# Altium PCB CloudCover.PcbDoc
Units mm, origin at the board's own origin, x right, y up, seen from the top; angles counter-clockwise.
Board outline 27.94 x 33.02 mm, 4 copper layers (Top Layer, Int1 (GND), Int2 (PWR), Bottom Layer), stack 0.76 mm thick; 67 components, 52 nets, 260 pads, 132 vias.
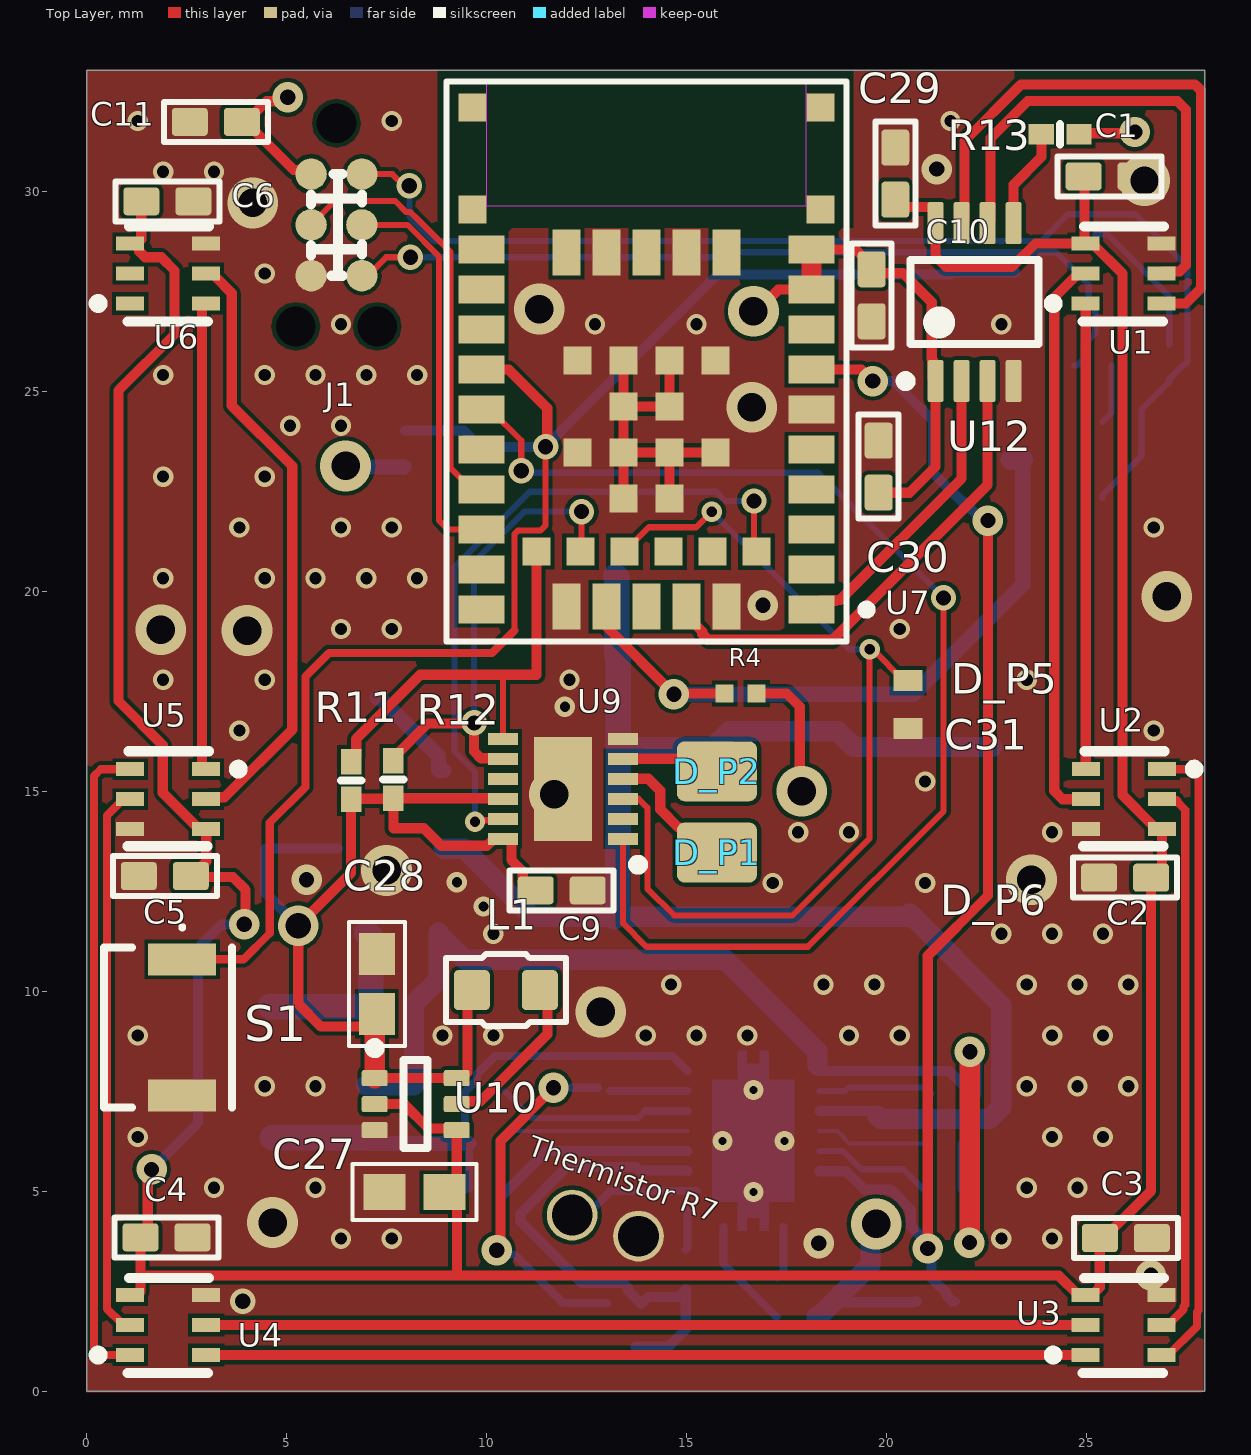
[diagram p0: Top Layer view]
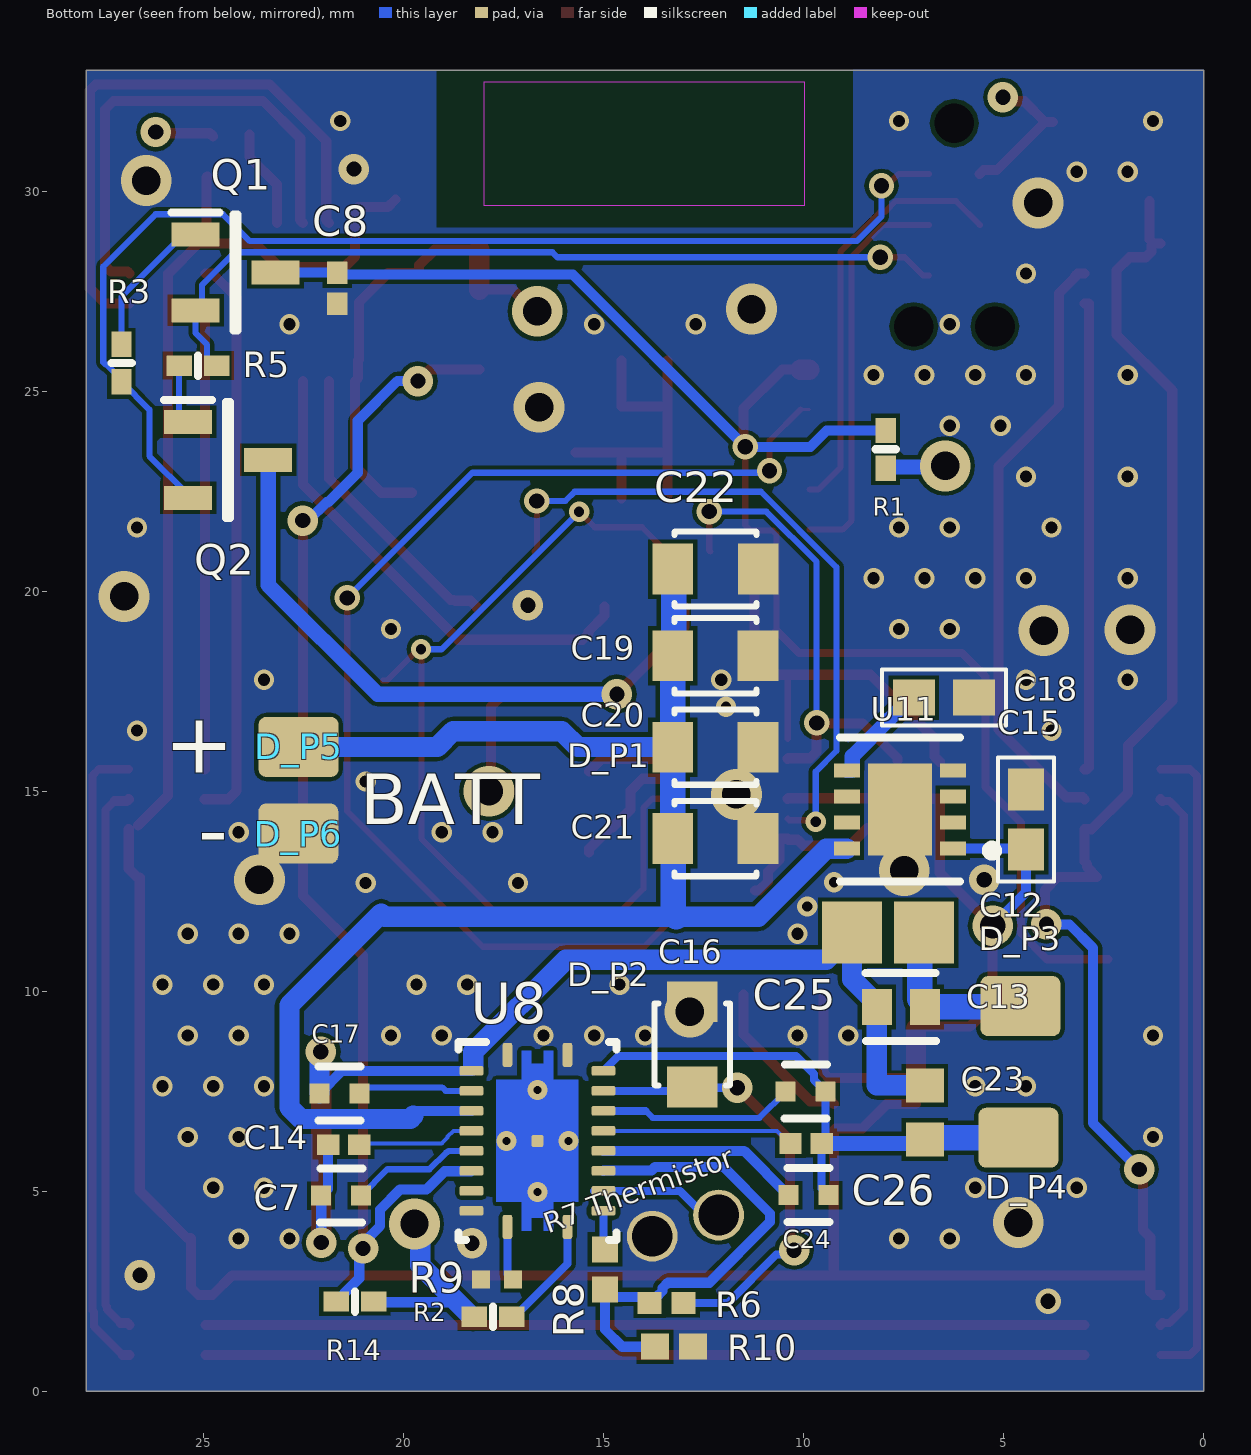
[diagram p1: Bottom Layer view, seen from below]
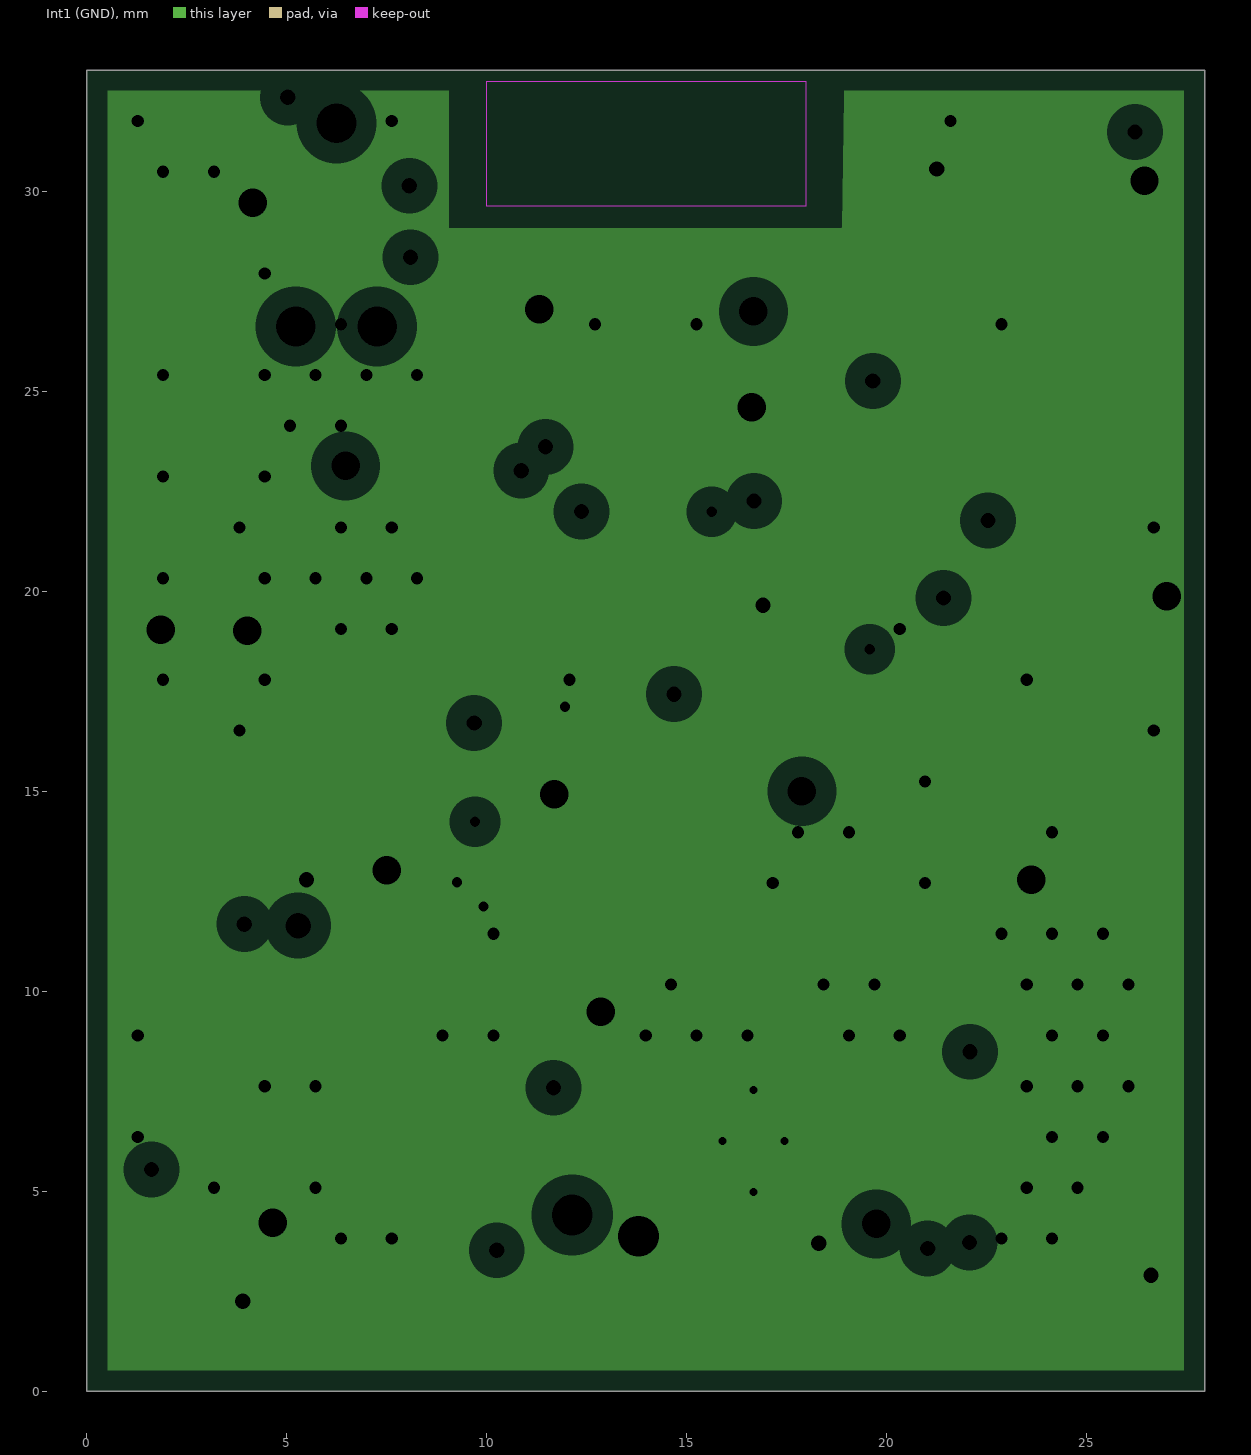
[diagram p2: Int1 (GND), clearances drawn from the general rule]
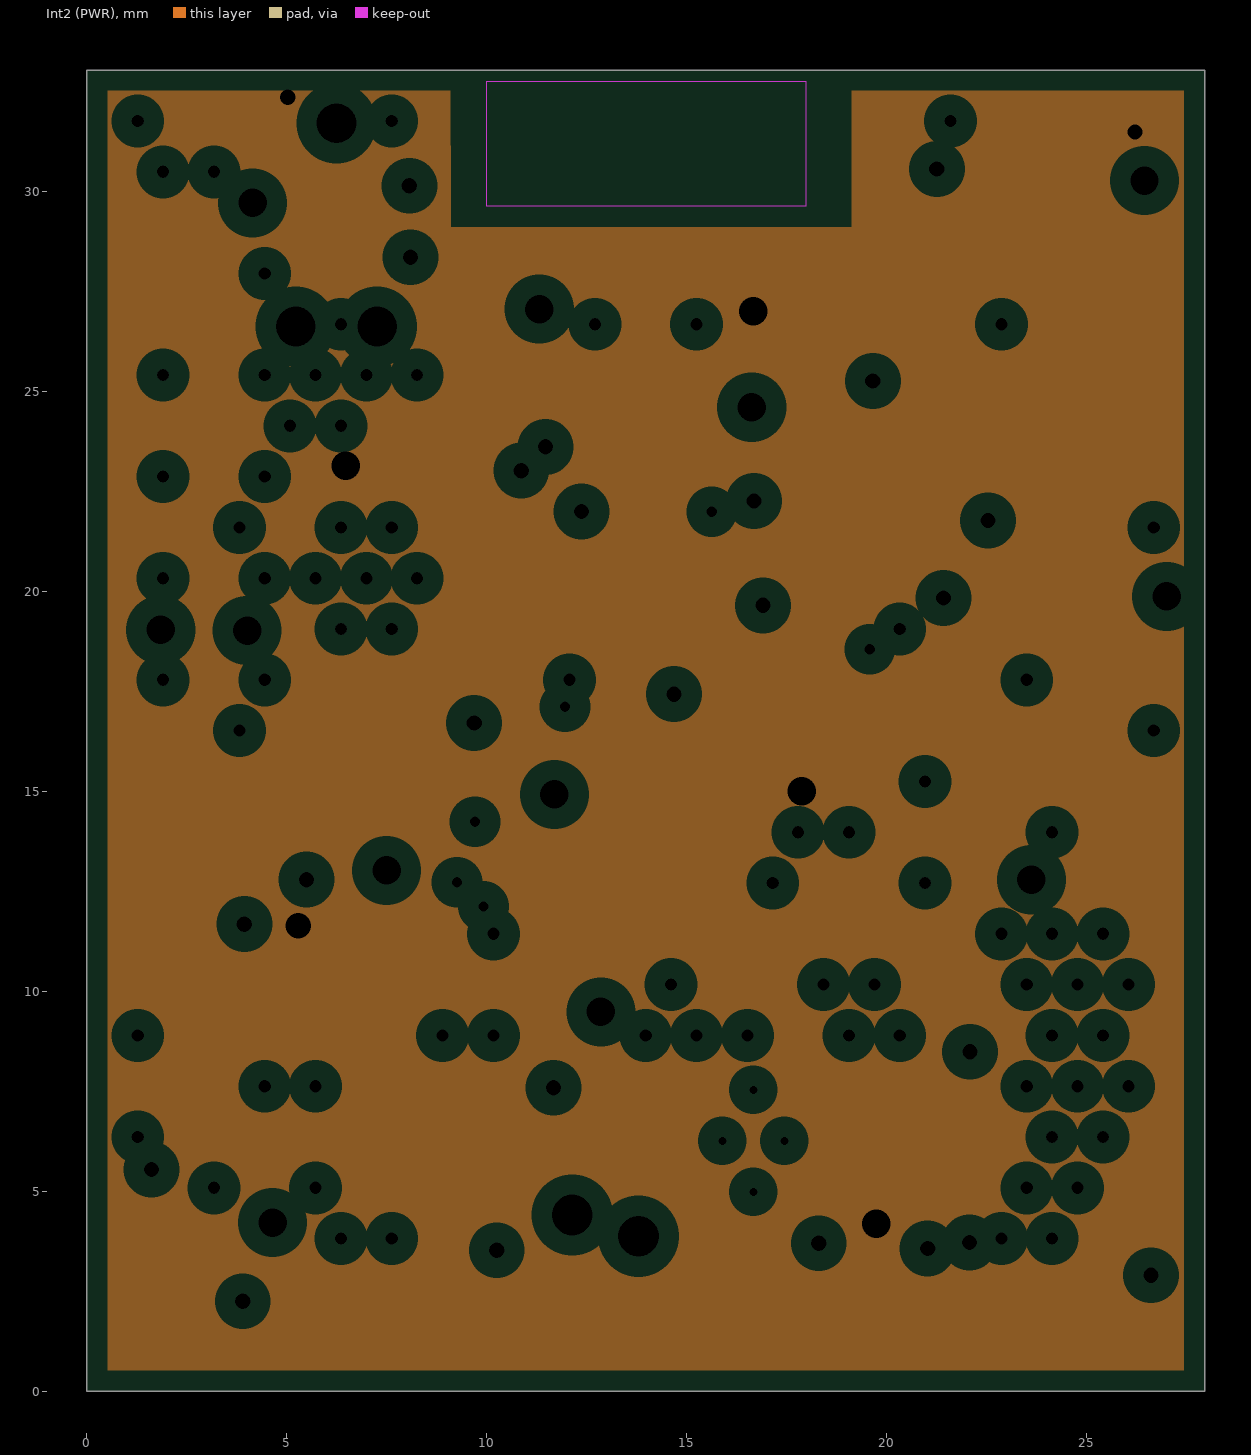
[diagram p3: Int2 (PWR), clearances drawn from the general rule]
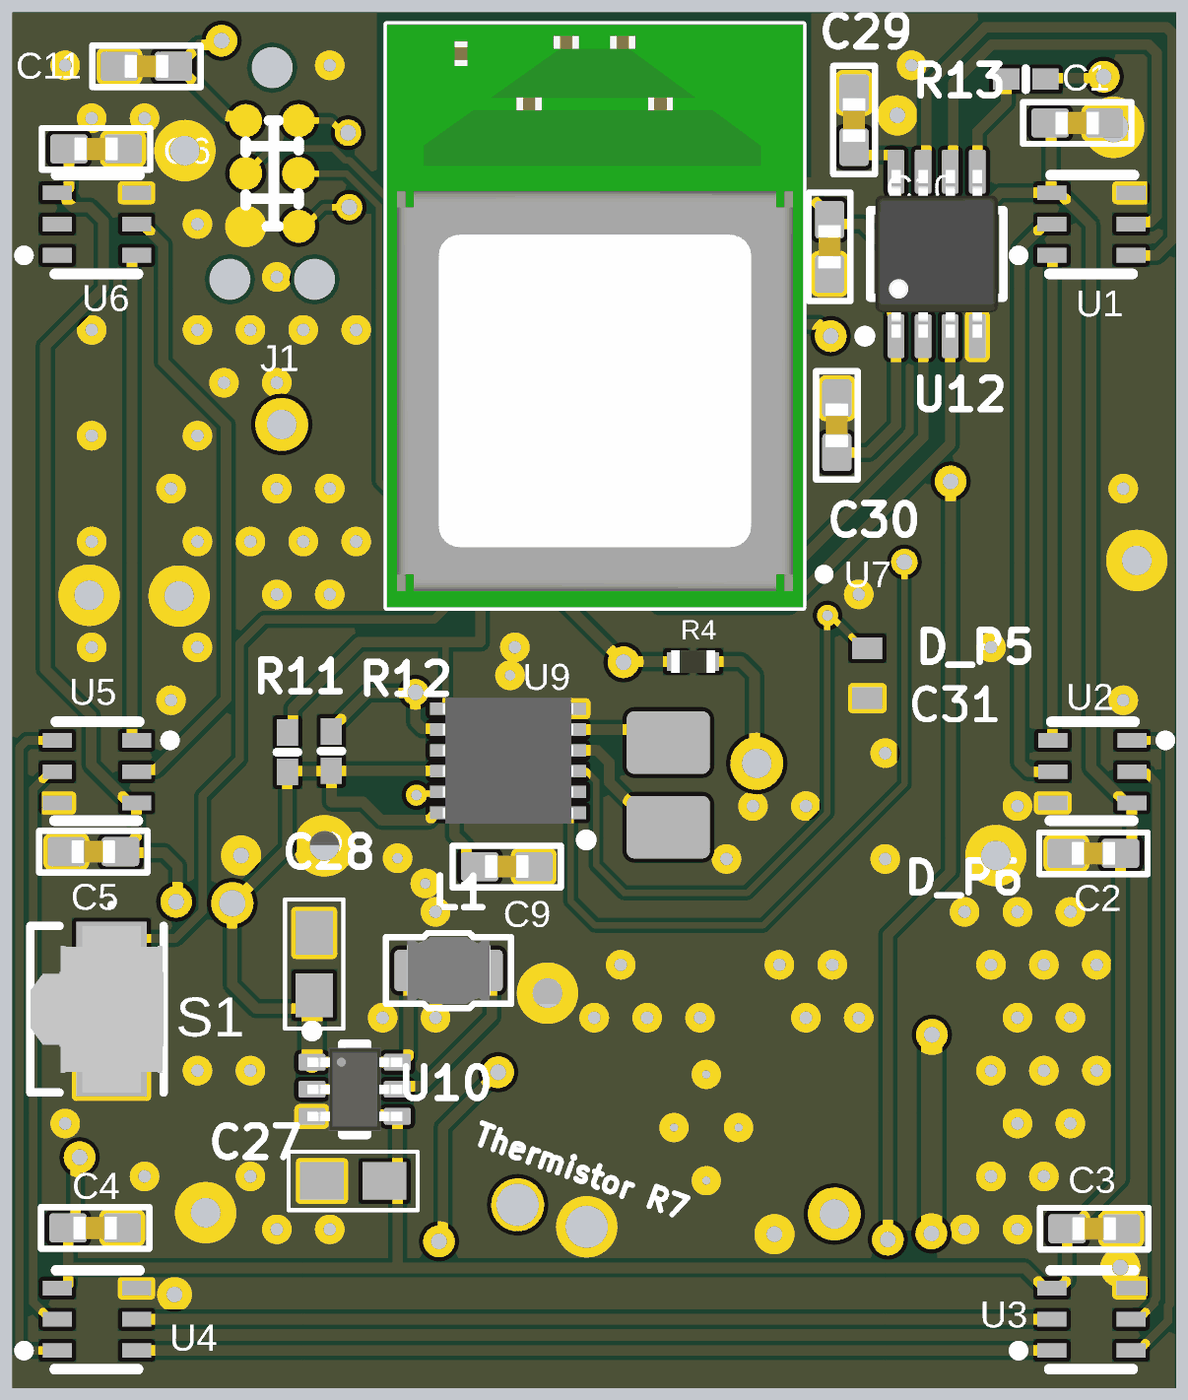
[diagram p4: 3D render of the assembled board from above, using the file's embedded part models]

## Layer stack, top to bottom
Top Solder: solder mask 0.0254, SM-001, Dk 4
Top Layer: signal copper 0.035
Dielectric 2: prepreg 0.11, PP-017, Dk 4.3
Int1 (GND): plane copper 0.035, net GND
Dielectric 3: core 0.4, Core-039, Dk 4.8
Int2 (PWR): plane copper 0.035, net 3V3
Dielectric 4: prepreg 0.11, PP-017, Dk 4.3
Bottom Layer: signal copper 0.035
Bottom Solder: solder mask 0.0254, SM-001, Dk 4

## Board outline
0,0 27.94,0 27.94,33.02 0,33.02

## Design rules (kind name [scope] priority, off if disabled: settings)
Clearance [All] p1: gap=0.102 ignorepadtopadclearanceinfootprint=FALSE except(0: Arc-Hole Track-Hole SMDPad-Hole THPad-Hole Via-Hole Fill-Hole Poly-Hole Region-Hole Text-Hole; 0.152: Arc-Text Track-Text SMDPad-Text THPad-Text Via-Text Fill-Text Poly-Text Region-Text Text-Text)
PlaneClearance [All] p1: clearance=0.508
PlaneConnect [All] p1: planeconnectstyle=Direct reliefexpansion=0.508 reliefentries=4 reliefconductorwidth=0.254 reliefairgap=0.254
PolygonConnect [All] p1: connectstyle=Direct reliefconductorwidth=0.254 reliefentries=4 polygonreliefangle="90 Angle" airgapwidth=0.254
RoutingVias [All] p1: holewidth=0.381 width=0.635 viastyle="Through Hole" minholewidth=0.381 minwidth=0.508 maxholewidth=0.711 maxwidth=1.27
SolderMaskExpansion [All] p1: expansion=0.102
Width [All] p1: maxlimit=0.635 minlimit=0.076 preferedwidth=0.254 minimp=50.000000 maximp=50.000000 favimp=50.000000
28 further rules are at their usual default settings.

## Components (designator, comment, footprint, x,y, rotation, side; value= is the part's Value field where it differs from the comment)
C1 "Cap, 0.1uF, 16V, X7R, 0402" SMC_IPC_0402 25.565,30.366 r0 top
C2 "Cap, 0.1uF, 16V, X7R, 0402" SMC_IPC_0402 25.954,12.835 r180 top
C3 "Cap, 0.1uF, 16V, X7R, 0402" SMC_IPC_0402 25.971,3.825 r0 top
C4 "Cap, 0.1uF, 16V, X7R, 0402" SMC_IPC_0402 1.989,3.843 r0 top
C5 "Cap, 0.1uF, 16V, X7R, 0402" SMC_IPC_0402 1.946,12.875 r180 top
C6 "Cap, 0.1uF, 16V, X7R, 0402" SMC_IPC_0402 2.009,29.743 r0 top
C7 "22nF" FP-CC0402-MFG 21.568,4.884 r0 bottom value="22 nF"
C8 "1uF" CAPC1005X55X25LL05T10 21.664,27.569 r90 bottom
C9 "Cap, 0.1uF, 16V, X7R, 0402" SMC_IPC_0402 11.869,12.517 r0 top
C10 "Cap, 0.1uF, 16V, X7R, 0402" SMC_IPC_0402 19.619,27.394 r270 top
C11 "Cap, 0.1uF, 16V, X7R, 0402" SMC_IPC_0402 3.221,31.727 r0 top
C12 ".22uF" CAPC2013X145X50ML20T25 7.894,11.458 r0 bottom
C13 ".018uF" FP-C0603C-CF-MFG 7.574,9.601 r0 bottom value="18,000 pF"
C14 ".47uF" CAPC1005X55X25LL05T10 21.505,6.159 r180 bottom
C15 "10uF" SMC_0603 4.448,14.29 r90 bottom
C16 "22uF" SMC_0805 12.789,8.666 r90 bottom
C17 "10nF, 16V" FP-CC0402-MFG 21.606,7.442 r180 bottom value="10 nF"
C18 "10uF" SMC_0603 6.5,17.333 r180 bottom
C19 "22uF" SMC_0805 12.213,18.382 r180 bottom
C20 "22uF" SMC_0805 12.213,16.096 r180 bottom
C21 "22uF" SMC_0805 12.213,13.81 r180 bottom
C22 "22uF" SMC_0805 12.21,20.549 r180 bottom
C23 "2400pF" CAPC1608X90X35NL10T15 6.975,6.965 r90 bottom
C24 "22nF" FP-CC0402-MFG 9.886,4.897 r0 bottom value="22 nF"
C25 "10nF, 16V" FP-CC0402-MFG 9.954,7.483 r0 bottom value="10 nF"
C26 ".47uF" CAPC1005X55X25LL05T10 9.944,6.19 r0 bottom
C27 "10uF" SMC_0603 8.184,4.971 r180 top
C28 "10uF" SMC_0603 7.247,10.178 r90 top
C29 "Cap, 0.1uF, 16V, X7R, 0402" SMC_IPC_0402 20.208,30.437 r90 top
C30 "Cap, 0.1uF, 16V, X7R, 0402" SMC_IPC_0402 19.794,23.109 r90 top
C31 "100 nF 50V" TDK-C1005-2_M 20.526,17.16 r90 top
D_P1 "PAD" "PAD 2x1.5"#1 15.197,14.155 r90 bottom
D_P2 "PAD" "PAD 2x1.5"#2 15.225,11.74 r90 bottom
D_P3 "PAD" "PAD 2x1.5"#3 4.585,9.622 r90 bottom
D_P4 "PAD" "PAD 2x1.5"#3 4.635,6.332 r90 bottom
D_P5 "PAD" "PAD 2x1.5"#4 22.631,16.101 r90 top
D_P6 "PAD" "PAD 2x1.5"#4 22.639,13.934 r90 top
J1 "TC2030-NL-FTDI TTL-232R USB" "TC2030-MCP - NL" 5.603,30.424 r270 top
L1 "LQH2MPN4R7MGRL" "Murata LQH2M" 10.472,10.023 r0 top
Q1 "KSC2223YMTF" SOT95P238X97-3N 24.207,27.965 r180 bottom
Q2 "KSC2223YMTF" SOT95P238X97-3N 24.392,23.282 r180 bottom
R1 "10.0K" "SMR_0402 - Basil" 7.955,23.543 r270 bottom
R2 "10.0K" "SMR_0402 - Basil" 17.767,1.857 r180 bottom
R3 "10.0K" "SMR_0402 - Basil" 27.057,25.697 r90 bottom
R4 "4.7K" RESC1005X40X25LL05T05 16.342,17.44 r0 top
R5 "10.0K" "SMR_0402 - Basil" 25.147,25.634 r0 bottom
R6 "42.2K" RESC1005X40X25NL05T10 13.429,2.205 r180 bottom
R8 "698" RESC1005X40X25ML05T05 14.971,3.04 r90 bottom
R9 "4.7K" RESC1005X40X25LL05T05 17.666,2.784 r180 bottom
R10 "200" RESC1005X40X25ML05T10 13.246,1.107 r0 bottom
R11 "10.0K" "SMR_0402 - Basil" 6.604,15.263 r90 top
R12 "10.0K" "SMR_0402 - Basil" 7.661,15.291 r90 top
R13 "10.0K" "SMR_0402 - Basil" 24.331,31.417 r0 top
R14 "10.0K" "SMR_0402 - Basil" 21.224,2.238 r180 bottom
S1 "B3U-3000P" OMRON-B3U-3000P_V 2.383,9.093 r270 top
U1 "APA102_2020" APA102_2020 25.908,27.94 r0 top locked
U2 "APA102_2020" APA102_2020 25.928,14.795 r180 top locked
U3 "APA102_2020" APA102_2020 25.908,1.651 r0 top locked
U4 "APA102_2020" APA102_2020 2.032,1.651 r0 top locked
U5 "APA102_2020" APA102_2020 2.032,14.795 r180 top locked
U6 "APA102_2020" APA102_2020 2.032,27.94 r0 top locked
U7 "NINA-W106" NINA_LGA48R_1400X1000X223_PCB 13.987,25.809 r90 top
U8 "BQ51050BRHLR" RHL0020A_V 16.66,6.253 r180 bottom
U9 "ST25DV04K-JFR6D3" SON50P302X302X60-13N 11.902,15.057 r180 top
U10 "TPS61222DCKR" DCK0006A_L 8.219,7.173 r0 top
U11 "AP7361C-33FGE-7" FP-U-DFN3030-8_Type_E-MFG 7.598,14.536 r0 bottom
U12 "SN74LVC2T45DCTR" DCT0008A_N 22.192,27.224 r90 top

## Footprints (in the part's own frame and the unit in brackets; to place one, negate y for a bottom-side part, rotate by r counter-clockwise, add the part's x,y. Pads: shape width x height; smd on the part's side, far side on the other; paste and mask are expansions set on the pad)
APA102_2020 [mm]
  rect 0.7x0.35 smd: 1(-0.95,-0.75) 2(-0.95,0) 3(-0.95,0.75) 4(0.95,0.75) 5(0.95,0) 6(0.95,-0.75)
  silkscreen extent -1.86,-1.2 1.02,1.18, body extent -1,-1 1,1, height 1
CAPC1005X55X25LL05T10 [mm] "Chip Capacitor, 2-Leads, Body 1.00x0.50mm, IPC High Density"
  rect 0.56x0.52 smd: 1(-0.39,0) 2(0.39,0)
  body extent -0.53,-0.28 0.53,0.28, height 0.55
CAPC1608X90X35NL10T15 [mm] "Chip Capacitor, 2-Leads, Body 1.60x0.80mm, IPC Medium Density"
  rect 0.85x0.95 smd: 1(-0.675,0) 2(0.675,0)
  body extent -0.85,-0.45 0.85,0.45, height 0.9
CAPC2013X145X50ML20T25 [mm] "Chip Capacitor, 2-Leads, Body 2.00x1.25mm, IPC Low Density"
  rect 1.5x1.55 smd: 1(-0.9,0) 2(0.9,0)
  body extent -1.1,-0.72 1.1,0.72, height 1.45
DCK0006A_L [mm] "SOT23, 6-Leads, Body 2.15x1.4mm, Pitch 0.65mm, IPC High Density"
  rrect25% 0.65x0.4 smd: 1(-1.025,0.65) 2(-1.025,0) 3(-1.025,-0.65) 4(1.025,-0.65) 5(1.025,0) 6(1.025,0.65)
  silkscreen extent -1.15,-1.1 0.3,1.52, body extent -1.14,-1 1.14,1, height 0.94
DCT0008A_N [mm] "SOP, 8-Leads, Body 2.9x3.2mm, Pitch 0.65mm, IPC Medium Density"
  rrect25% 1.05x0.4 smd: 1(-1.975,0.975) 2(-1.975,0.325) 3(-1.975,-0.325) 4(-1.975,-0.975) 5(1.975,-0.975) 6(1.975,-0.325) 7(1.975,0.325) 8(1.975,0.975)
  silkscreen extent -2.1,-1.6 1.05,1.85, body extent -2.01,-1.47 2.01,1.48, height 1.3
FP-C0603C-CF-MFG [mm]
  rect 0.75x0.9 smd paste+0 mask+0: 1(-0.6,0) 2(0.6,0)
  silkscreen extent -0.87,-0.85 0.88,0.85, body extent -0.8,-0.4 0.8,0.4, height 0.87
FP-CC0402-MFG [mm]
  rect 0.5x0.5 smd paste+0 mask+0: 1(-0.5,0) 2(0.5,0)
  silkscreen extent -0.53,-0.68 0.53,0.67, body extent -0.5,-0.25 0.5,0.25, height 0.55
FP-U-DFN3030-8_Type_E-MFG [mm]
  rect 0.65x0.35 smd paste+0 mask+0: 1(-1.325,0.975) 2(-1.325,0.325) 3(-1.325,-0.325) 4(-1.325,-0.975) 5(1.325,-0.975) 6(1.325,-0.325) 7(1.325,0.325) 8(1.325,0.975)
  rect 1.6x2.3 smd paste+0 mask+0: 9(0,0)
  silkscreen extent -2.42,-1.8 1.5,1.8, body extent -1.5,-1.5 1.5,1.5, height 0.63
"Murata LQH2M" [mm] "Chip Inductor, 2.00x1.60mm"
  rrect25% 0.9x1 smd: 1(-0.85,0) 2(0.85,0)
  silkscreen extent -1.5,-0.9 1.5,0.9, body extent -1,-0.8 1,0.8, height 0.9
NINA_LGA48R_1400X1000X223_PCB [mm] "Stand-alone Bluetooth low energy module"
  rect 0.7x1.15 smd paste+0 mask+0.05: 1(-6.275,-4.125) 2(-5.275,-4.125) 3(-4.275,-4.125) 4(-3.275,-4.125) 5(-2.275,-4.125) 6(-1.275,-4.125) 7(-0.275,-4.125) 8(0.725,-4.125) 9(1.725,-4.125) 10(2.725,-4.125) 16(2.725,4.125) 17(1.725,4.125) 18(0.725,4.125) 19(-0.275,4.125) 20(-1.275,4.125) 21(-2.275,4.125) 22(-3.275,4.125) 23(-4.275,4.125) 24(-5.275,4.125) 25(-6.275,4.125)
  rect 1.15x0.7 smd paste+0 mask+0.05: 11(2.65,-2) 12(2.65,-1) 13(2.65,0) 14(2.65,1) 15(2.65,2) 26(-6.2,2) 27(-6.2,1) 28(-6.2,0) 29(-6.2,-1) 30(-6.2,-2)
  rect 0.7x0.7 smd paste+0 mask+0.05: 31(-4.825,-2.75) 32(-4.825,-1.65) 33(-4.825,-0.55) 34(-4.825,0.55) 35(-4.825,1.65) 36(-4.825,2.75) 37(-3.5,-0.575) 38(-3.5,0.575) 39(-2.35,-1.725) 40(-2.35,-0.575) 41(-2.35,0.575) 42(-2.35,1.725) 43(-1.2,-0.575) 44(-1.2,0.575) 45(-0.05,-1.725) 46(-0.05,-0.575) 47(-0.05,0.575) 48(-0.05,1.725) EG(3.725,-4.35) EG(3.725,4.35) EG(6.275,-4.35) EG(6.275,4.35)
  Keep-Out Layer region: 3.825,-4 6.925,-4 6.925,4 3.825,4
  silkscreen extent -7.07,-5.6 6.93,5, body extent -7.08,-5 6.92,5, height 2.25
OMRON-B3U-3000P_V [mm] "SMD, 2-Leads, Body 4x3.2mm"
  rect 0.8x1.7 smd: 1(-1.7,0) 2(1.7,0)
  silkscreen extent -2.55,-1.95 2,1.25, body extent -2,-1.95 2,1.25, height 1.2
"PAD 2x1.5"#1 [mm]
  rrect25% 1.5x2 smd far side: 1(-0.693,0.551)
"PAD 2x1.5"#2 [mm]
  rrect25% 1.5x2 smd far side: 1(3.754,0.523)
"PAD 2x1.5"#3 [mm]
  rrect25% 1.5x2 smd: 1(0,0)
"PAD 2x1.5"#4 [mm]
  rrect25% 1.5x2 smd far side: 1(0,0)
RESC1005X40X25LL05T05 [mm] "Chip Resistor, 2-Leads, Body 1.05x0.55mm, IPC High Density"
  rect 0.45x0.45 smd: 1(-0.4,0) 2(0.4,0)
  body extent -0.52,-0.28 0.52,0.28, height 0.4
RESC1005X40X25ML05T05 [mm] "Chip Resistor, 2-Leads, Body 1.00x0.50mm, IPC Low Density"
  rect 0.65x0.65 smd: 1(-0.5,0) 2(0.5,0)
  body extent -0.53,-0.27 0.53,0.28, height 0.4
RESC1005X40X25ML05T10 [mm] "Chip Resistor, 2-Leads, Body 1.00x0.50mm, IPC Low Density"
  rect 0.7x0.65 smd: 1(-0.475,0) 2(0.475,0)
  body extent -0.53,-0.27 0.53,0.28, height 0.4
RESC1005X40X25NL05T10 [mm] "Chip Resistor, 2-Leads, Body 1.00x0.50mm, IPC Medium Density"
  rect 0.6x0.55 smd: 1(-0.425,0) 2(0.425,0)
  body extent -0.53,-0.27 0.53,0.28, height 0.4
RHL0020A_V [mm] "QFN, 20-Leads, Body 4.5x3.5mm, Pitch 0.5mm, Thermal Pad 3.05x2.05mm, TI Recommended"
  rrect42% 0.24x0.6 smd: 1(-0.75,2.15) 10(-0.75,-2.15) 11(0.75,-2.15) 20(0.75,2.15)
  rrect42% 0.6x0.24 smd: 2(-1.65,1.75) 3(-1.65,1.25) 4(-1.65,0.75) 5(-1.65,0.25) 6(-1.65,-0.25) 7(-1.65,-0.75) 8(-1.65,-1.25) 9(-1.65,-1.75) 12(1.65,-1.75) 13(1.65,-1.25) 14(1.65,-0.75) 15(1.65,-0.25) 16(1.65,0.25) 17(1.65,0.75) 18(1.65,1.25) 19(1.65,1.75)
  rrect33% 0.3x0.3 smd paste-0.15 mask+0: 21(0,0)
  Top Layer region: 0.16,2.25 0.16,1.925 -0.16,1.925 -0.16,2.25 -0.39,2.25 -0.39,1.525 -1.025,1.525 -1.025,-1.525 -0.39,-1.525 -0.39,-2.25 -0.16,-2.25 -0.16,-1.925 0.16,-1.925 0.16,-2.25 0.39,-2.25 0.39,-1.525 1.025,-1.525 1.025,1.525 0.39,1.525 0.39,2.25
  silkscreen extent -1.98,-2.47 1.98,2.47, body extent -1.82,-2.33 1.83,2.32, height 1.01
SMC_0603 [mm] "Surface Mount Capacitor 0603"
  rect 1.05x0.9 smd: 1(-0.75,0) 2(0.75,0)
  silkscreen extent -1.55,-0.7 1.55,0.7, body extent -0.85,-0.45 0.85,0.45, height 0.9
SMC_0805 [mil] "SMC_0805"
  rect 40x50 smd: 1(-42,0) 2(42,0)
  silkscreen extent -40,-37 40,37, body extent -33,-18 33,18, height 35
SMC_IPC_0402 [mm] "Surface Mount Capacitor 0402"
  rrect25% 0.9x0.7 smd: 1(-0.65,0) 2(0.65,0)
  silkscreen extent -1.3,-0.5 1.3,0.5, body extent -0.52,-0.27 0.53,0.28, height 0.55
"SMR_0402 - Basil" [mil] "SMR_0402"
  rect 25x20 smd: 1(-18.5,0) 2(18.5,0)
  silkscreen extent 0,-10 0,10, body extent -22,-10 22,10, height 16
SON50P302X302X60-13N [mm]
  rect 0.75x0.3 smd: 1(-1.5,1.25) 2(-1.5,0.75) 3(-1.5,0.25) 4(-1.5,-0.25) 5(-1.5,-0.75) 6(-1.5,-1.25) 7(1.5,-1.25) 8(1.5,-0.75) 9(1.5,-0.25) 10(1.5,0.25) 11(1.5,0.75) 12(1.5,1.25)
  rect 1.45x2.6 smd: 13(0,0)
  silkscreen extent -2,1.78 -1.75,2.02, body extent -1.56,-1.51 1.56,1.51, height 0.6
SOT95P238X97-3N [mm]
  rect 1.2x0.6 smd: 1(-1,0.95) 2(-1,-0.95) 3(1,0)
  silkscreen extent -1.6,-1.45 0.05,1.5, body extent -1.19,-1.45 1.19,1.45, height 0.97
"TC2030-MCP - NL" [mil] "TAG CONN ICD3 INTERFACE FOOTPRINTS"
  round 0 hole 39 unplated: 0(-50,25) 0(150,-15) 0(150,65)
  round 31 smd paste-15.51: 1(0,0) 2(0,50) 3(50,0) 4(50,50) 5(100,0) 6(100,50)
  silkscreen extent 0,0 100,50
TDK-C1005-2_M [mm] "Chip Capacitor, 2-Leads, Body 1.05x0.55mm, IPC Low Density"
  rect 0.52x0.72 smd: 1(-0.6,0) 2(0.6,0)
  body extent -0.52,-0.28 0.53,0.27, height 0.55

## Part data
C1 C2 C3 C4 C5 C6 C9 C10 C11 C29 C30: library part 31-10107, "Capacitor, Ceramic, 0402, X7R, 16V, 0.1uF", Capacitance=0.1µF, Manufacturer="Murata Electronics North America", Manufacturer Part Number=GCM155R71C104KA55D, Operating Temperature="-55°C ~ 125°C", Package / Case=0402, Ratings=AEC-Q200, Supplier Part Number - Cut Tape=490-4759-1-ND, Supplier Part Number - T&R=490-4759-2-ND, Tolerance=?0%, Voltage - Rated=16V, Applications=Automotive, Category=Capacitors, Kickr Part Number=31-10107, Mounting Type="Surface Mount", Supplier=Digi-Key, Thickness (Max)="0.022\""
C7 C24: library part CMP-03422-000454-1, "CC0402KPX7R7BB223 CC0402 22 nF X7R 10.00% 16 V", Capacitance="22 nF", Manufacturer=YAGEO, Manufacturer Part Number=CC0402KPX7R7BB223, Package=CC0402, Temperature="-55°C to +125°C", Temperature Characteristic=X7R, Temperature Coefficient=30ppm/°C, Temperature Range High=+125°C, Temperature Range Low=-55°C, Tolerance=0.1, Voltage Rating="16 V", Automotive=No, Automotive Grade=NA, Category=Cap, ComponentLink2Description=Datasheet, ComponentLink2URL=http://www.yageo.com/documents/recent/UPY-GP_NP0_16V-to-50V_16.pdf, Device Class L1="Passive Components", Device Class L2=Capacitors, Device Class L3="Ceramic Capacitors", Footprint Url=http://www.yageo.com/exep/pages/download/literatures/UPY-C_GEN_24.pdf, Height=0.55mm, Ipc Land Pattern Name=CAPC10050X50, Lead Free=Yes, Material=Ceramic, Mouser Description="Multilayer Ceramic Capacitors MLCC - SMD/SMT 22nF 16V X7R 10%", Octopart=https://octopart.com/cc0402kpx7r7bb223-yageo-39266182, RoHS=TRUE
C8: library part CMP-2008-04506-1, "GRM155C80J105KE15D", Manufacturer=Murata, Part Number=GRM155C80J105KE15D
C12: library part CMP-2007-01110-1, "C0805C224J5RACTU", Manufacturer=Kemet, Part Number=C0805C224J5RACTU
C13: library part CMP-03020-009056-1, "C0603C183J5RAC7867 C0603 18,000 pF X7R 30ppm/°C 5.00% 50 V", Capacitance="18,000 pF", Manufacturer=KEMET, Manufacturer Part Number=C0603C183J5RAC7867, Package=C0603C-CF, Temperature="-55°C to +125°C", Temperature Characteristic=X7R, Temperature Coefficient=30ppm/°C, Temperature Range High=+125°C, Temperature Range Low=-55°C, Tolerance=0.05, Voltage Rating="50 V", Automotive=Yes, Automotive Grade="Grade 1", Category=Cap, ComponentLink2Description=Datasheet, ComponentLink2URL=https://api.kemet.com/component-edge/download/datasheet/C0603C100J5GACAUTO.pdf, Device Class L1="Passive Components", Device Class L2=Capacitors, Device Class L3="Ceramic Capacitors", Height=0.87mm, Lead Free=Yes, Material=Ceramic, Octopart=https://octopart.com/c0603c183j5rac7867-kemet-1732095, RoHS=TRUE
C14 C26: library part CMP-2008-04548-1, "GRM155R60J474KE19D .47uF 0402", Manufacturer=Murata, Part Number=GRM155R60J474KE19D
C15 C18 C27 C28: library part 31-10103, "CAP CER 10UF 16V X6S 0603", Manufacturer="Murata Electronics North America", Manufacturer Part Number=GRM188C81C106MA73D, Operating Temperature="-55°C ~ 125°C", Package / Case="0603 (1608 Metric)", Ratings=-, Supplier Part Number 1=490-7198-2-ND, Temperature Coefficient=X7R, Tolerance=?0%, Voltage - Rated=50V, Applications="General Purpose", Capacitance=10uF, Category=Capacitors, Features=-, Height - Seated (Max)=-, Kickr Part Number=31-10103, Lead Spacing=-, Lead Style=-, Mounting Type="Surface Mount, MLCC", Packaging="Cut Tape (CT)", RoHS="RoHS Compliant", Size / Dimension="0.063\" L x 0.032\" W (1.60mm x 0.80mm)", Supplier 1=Digi-Key, Thickness (Max)="0.035\" (0.90mm)"
C16 C19 C20 C21 C22: library part 31-10002, "CAP CER 22UF 10V 20% X5R 0805", Capacitance=22µF, Dielectric=X5R, Manufacturer="TDK Corporation", Manufacturer 1=Samsung, Manufacturer Part Number=C2012X5R1A226M125AB, Manufacturer Part Number 1=CL21A226MPQNNNE, Operating Temperature="-55°C ~ 85°C", Package=0805, Package / Case="0805 (2012 Metric)", Ratings=-, Supplier Part Number 1=445-7665-6-ND, Tolerance=20%, Voltage - Rated=10V, Applications="General Purpose", Category=Capacitors, Comp Height (mm)=0.9, ComponentLink1Description=Datasheet, ComponentLink1URL=http://www.tdk.com/pdf/TDKMLCCCapRange.pdf, ComponentLink2Description=http://product.tdk.com/en/catalog/datasheets/mlcc_commercial_general_en.pdf, ComponentLink2URL=http://product.tdk.com/en/catalog/datasheets/mlcc_commercial_general_en.pdf, Cost=0.14950, Features=-, Height - Seated (Max)=-, Innovolt Part Number=31-10002, Lead Spacing=-, Lead Style=-, Mounting Type="Surface Mount, MLCC", Packaging=Digi-Reel®, Pricing 1="1=0.52, 10=0.455, 100=0.2275, 250=0.182, 500=0.16576, 1000=0.1495 (USD)", RoHS=Y, Size / Dimension="0.079\" L x 0.049\" W (2.00mm x 1.25mm)", Stock 1=151477, Supplier 1=Digi-Key, Temperature Coefficient=X5R, Thickness (Max)="0.057\" (1.45mm)", Voltage Rating=10V
C17 C25: library part CMP-03422-000501-1, "CC0402KRX7R7BB103 CAP CER 10000PF 16V X7R 0402", Capacitance="10 nF", Manufacturer=YAGEO, Manufacturer Part Number=CC0402KRX7R7BB103, Package=CC0402, Temperature="-55°C to +125°C", Temperature Characteristic=X7R, Temperature Coefficient=30ppm/°C, Temperature Range High=+125°C, Temperature Range Low=-55°C, Tolerance=0.1, Voltage Rating="16 V", Automotive=No, Automotive Grade=NA, Category=Cap, ComponentLink2Description=Datasheet, ComponentLink2URL=http://www.yageo.com/documents/recent/UPY-GP_NP0_16V-to-50V_16.pdf, Device Class L1="Passive Components", Device Class L2=Capacitors, Device Class L3="Ceramic Capacitors", Digikey Description="CAP CER 10000PF 16V X7R 0402", Footprint Url=http://www.yageo.com/exep/pages/download/literatures/UPY-C_GEN_24.pdf, Height=0.55mm, Ipc Land Pattern Name=CAPC10050X50, Lead Free=Yes, Material=Ceramic, Mouser Description="0402 10 nF 16 V ?0 % Tolerance X7R SMT Multilayer Ceramic Capacitor", Octopart=https://octopart.com/cc0402krx7r7bb103-yageo-192895, RoHS=TRUE
C23: library part CMP-2006-02639-1, "GRM1885C1H242JA01D", Manufacturer=Murata, Part Number=GRM1885C1H242JA01D
C31: library part CMP-2000-05393-1, "C1005X7R1H104K050BB Chip Capacitor, 0.1 uF, +/- 10%, 50 V, -55 to 125 degC, 0402(1005 Metric), RoHS, Tape and Reel", Capacitance=0.1µF, Manufacturer=TDK, Operating Temperature=-55degC~125degC, Package / Case=0402(1005Metric), PCN Part Number=MLCCPartNumberChange30/Nov/2012, Ratings=-, Standard Package=1, Temperature Coefficient=X7R, Tolerance=?0%, Voltage - Rated=50V, Applications=GeneralPurpose, Category=Capacitors, Datasheet URL=http://www.farnell.com/datasheets/1913358.pdf, Datasheet Version=Mar-15, Family=CeramicCapacitors, Features=-, Height - Seated (Max)=-, Kits=445-9021-KIT-ND-KITMLCC100PF-10UF04026.3-50V445-9003-KIT-ND-KITCAPCERHICAPMLCCSMD, Lead Spacing=-, Lead Style=-, Manufacturer URL=http://www.tdk.com/, Mounting Type=SurfaceMount,MLCC, Online Catalog=CSeries,GeneralPurpose, Other Names=445-5932-1, Packaging=CutTape(CT), Product Training Modules=CSeriesGeneralApplicationsSEAT,CCV,andTVCLDesignToolsGuidetoReplacinganElectrolyticCapacitorwithanMLCC, RoHS Information=RoHSCertificate-MLCC, Series=C, Size / Dimension="0.039\"Lx0.020\"W(1.00mmx0.50mm)", Thickness (Max)="0.022\"(0.55mm)"
D_P1 D_P2 D_P3 D_P4 D_P5 D_P6: library part PAD_1
J1: library part TC2030-NL, "Footprint TC2030-CTX Debug Connector", Innovolt Part Number=40-10067, Manufacturer=Tag-Connect, Supplier Part Number 1=TC2030-CTX, Category="Programmer Accessories", Minimum Order Quantity=1, Product="Debug Cables", Product Category="Evaluation Boards, Development Kits, Tools and Software", Reeling=False, RoHS="RoHS Compliant", RoHS - Mouser=Y, Standard Pack Qty=1, Stock 1=0, Supplier 1=Tag-Connect
L1: library part 33-10059, "Inductor, Shielded, 580mA, 720mO, ?0%, 4.7uH, 0806", Current Rating=580mA, Inductance=4.7uH, Manufacturer=Murata, Operating Temperature="-40°C ~ 105°C", Package / Case=0806, Supplier Part Number - Cut Tape=490-15918-1-ND, Supplier Part Number - T&R=490-15918-2-ND, Tolerance=?0%, Category="Inductors, Coils, Chokes", Core Material=Ferrite, DCR=720mO, Height=0.95mm, Kickr Part Number=33-10059, Manufacturer Part Number=LQH2MPN4R7MGRL, Mounting Type="Surface Mount", Shielding=Shielded, SRF=40MHz, Supplier=Digi-Key, Type=Wirewound
Q1 Q2: "Transistor BJT NPN", Manufacturer_Name="ON Semiconductor", Mouser Part Number=512-KSC2223YMTF, Arrow Part Number=KSC2223YMTF, Arrow Price/Stock=https://www.arrow.com/en/products/ksc2223ymtf/on-semiconductor, Datasheet Link=http://uk.rs-online.com/web/p/products/8064484, Height=0.97mm, Manufacturer_Part_Number=KSC2223YMTF, Mouser Price/Stock=https://www.mouser.com/Search/Refine.aspx?Keyword=512-KSC2223YMTF
R1 R2 R3 R5 R11 R12 R13 R14: library part 32-10000, "RES 10.0K OHM 1/16W 1% 0402 SMD", Manufacturer=Yageo, Manufacturer Part Number=RC0402FR-0710KL, Package=0402, Package / Case="0402 (1005 Metric)", Power=1/16W, Power (Watts)="0.063W, 1/16W", Resistance (Ohms)=10k, Supplier Part Number 1=311-10.0KLRCT-ND, Temperature Coefficient=?00ppm/°C, Tolerance=?%, Category=Resistors, Comp Height (mm)=0.7, ComponentLink1Description=Datasheet, ComponentLink1URL=http://www.yageo.com/documents/recent/PYu-RC0402_51_RoHS_L_6.pdf, Composition="Thick Film", Cost=0.00203, Digikey=311-10.0KLRDKR-ND, Features=-, Height="0.016\" (0.40mm)", Innovolt Part Number=32-10000, Number of Terminations=2, Packaging="Cut Tape (CT)", Pricing 1="1=0.1, 10=0.015, 25=0.0108, 100=0.006, 250=0.00456, 500=0.00364, 1000=0.00268, 2500=0.00233, 5000=0.00192 (USD)", RoHS=Y, Rule=Undefined, Size / Dimension="0.039\" L x 0.020\" W (1.00mm x 0.50mm)", Stock 1=7229047, Supplier 1=Digi-Key, Supplier Device Package=0402
R4 R9: library part CMP-1665-00031-3, "ERJ-2RKF4 701XChip Resistor, 4.7 KOhm, +/- 1%, 0.1 W, -55 to 155 degC, 0402 (1005 Metric), RoHS, Tape and Reel", Case Code (Imperial)=0402, Case Code (Metric)=1005, Max Operating Temperature="155 degC", Min Operating Temperature="-55 degC", Package Quantity=1, PartNumber=ERJ-2RKF4701X, Power Rating="100 mW", Resistance="4.7 KOhm", Tolerance=1%, Voltage Rating="50 V", Case\/Package=0402, ComponentLink1Description="Manufacturer URL", ComponentLink1URL=http://www.panasonic.com/, ComponentLink2Description=Datasheet, ComponentLink2URL=http://industrial.panasonic.com/cdbs/www-data/pdf/RDA0000/AOA0000C86.pdf, DatasheetVersion=04/2015, Height="0.35 mm", Length="1 mm", Mount="Surface Mount", Mounting Technology="Surface Mount", PackageDescription="2-Pin Surface Mount Device, Body 1 x 0.5 mm", PackageReference=0402, Packaging="Cut Tape", Pins=2, Radiation Hardening=No, REACH SVHC=Yes, RoHSCompliant=true, Width="0.5 mm"
R6: library part CMP-2002-07058-1, "RC0402FR-0742K2L 42.2K, 1/16W, 0402", Manufacturer="Yageo / Phycomp", Part Number=RC0402FR-0742K2L
R8: library part CMP-2002-00177-1, "CRCW0402698RFKED 698 ohm, 1/16W, 0402", Manufacturer="Vishay Dale", Part Number=CRCW0402698RFKED
R10: library part CMP-2002-07498-1, "RC0402FR-07200RL 200 ohm, 1/16W, 0402", Manufacturer="Yageo / Phycomp", Part Number=RC0402FR-07200RL
S1: library part CMP-1677-00003-1, "Ultra-Small Tactile Switch, 1 to 50 mA, 3 to 12 V, -25 to 70 degC, 2-Pin SMD, RoHS, Tape and Reel", Capacitance="470 uF", Case\Package=Radial, Max Operating Temperature="85 degC", Min Operating Temperature="-40 degC", Package Quantity=200, Tolerance=20%, Voltage Rating="50 V", ComponentLink1Description="Manufacturer URL", ComponentLink1URL=http://www.omron.com/, ComponentLink2Description=Datasheet, ComponentLink2URL=https://www.omron.com/ecb/products/pdf/en-b3u.pdf, DatasheetVersion=Jan-15, Diameter="10 mm", Height="20 mm", Lead Pitch="5 mm", Length="20 mm", Mount="Through Hole", PackageDescription="2-Pin Surface Mount Device, Body 4 x 3.2 mm", PackageReference=B3U-3000P, Packaging=Bulk, Pins=2, Radiation Hardening=No, REACH SVHC="No SVHC", RoHSCompliant=true, Voltage Rating (DC)="50 V"
U1 U2 U3 U4 U5 U6: library part APA1022020, "ADDRESS LED DISCRETE SERIAL RGB", Case/Package=Radial, Color=Blue,Green,Red, Forward Voltage=3.3V, Lens Color=Colorless, Manufacturer="Adafruit Industries", Manufacturer Part Number=3341, Package=MICROBUILDER_APA102_2020, Supplier Part Number 1=1528-1826-ND, Test Current=20mA, ComponentLink1Description=http://www.led-color.com/upload/201604/APA102-2020%20SMD%20LED.pdf?src-supplier=Digi-Key, ComponentLink1URL=http://www.led-color.com/upload/201604/APA102-2020%20SMD%20LED.pdf?src-supplier=Digi-Key, DeviceName=2020, DeviceSetName=MICROBUILDER_APA102, Dominant Wavelength=470nm, Element Configuration="Common Anode", GateName_1=G$1, Height=8.85mm, Interface=Serial, Lens Size=5mm, Lens Style=Round,Domed, Lens Transparency=Clear, LibraryName="Adafruit DotStar 2020 8x8 Matrix", Luminous Intensity=1800mcd, Mount="Through Hole", Number of LEDs=10, Packaging=Bulk, Pricing 1="1=5.95000 (USD)", RoHS=No, Stock 1=3057, Supplier 1=Digi-Key, SymbolName_1=MICROBUILDER_APA102, Viewing Angle=50°
U7: "Stand-alone Bluetooth low energy module", Manufacturer=u-blox, Part Description="Stand-alone Bluetooth low energy module"
U8: library part CMP-0393-00008-2, "Qi (WPC) Compliant Highly Integrated Secondary-Side Direct Lithium Ion Charger, 4 V Min Input, 20-pin VQFN (RHL), Green (RoHS & no Sb/Br)", Charge Current(Max)(A)=1.5, ComponentLink1Description="Manufacturer URL", ComponentLink1URL=http://www.ti.com/, ComponentLink2Description=Datasheet, ComponentLink2URL=http://www.ti.com/lit/ds/symlink/bq51050b.pdf, ComponentLink3Description="Package Specification", ComponentLink3URL=http://www.ti.com/lit/ds/symlink/bq51051b.pdf, DatasheetVersion=SLUSB42D, Eco-Plan=TRUE, Mounting Technology="Surface Mount", PackageDescription="20-Pin Plastic Flat Pack, Body 4.5 x 3.5 mm, Pitch 0.5 mm", PackageReference=RHL0020A, PackageVersion="4205346-3/J, 12/2011", PartNumber=BQ51050BRHLR, Vin(Min)(V)=4
U9: "RFID Integrated Circuit", Manufacturer_Name=STMicroelectronics, Mouser Part Number=511-ST25DV04K-JFR6D3, Arrow Part Number=ST25DV04K-JFR6D3, Arrow Price/Stock=https://www.arrow.com/en/products/st25dv04k-jfr6d3/stmicroelectronics, Datasheet Link=https://www.st.com/resource/en/datasheet/st25dv04k.pdf, Height=0.6mm, Manufacturer_Part_Number=ST25DV04K-JFR6D3, Mouser Price/Stock=https://www.mouser.co.uk/ProductDetail/STMicroelectronics/ST25DV04K-JFR6D3?qs=xjeEZJU9OePNJkiLfy0Kbw%3D%3D
U10: library part CMP-0347-00055-2, "Boost Voltage Converter with 0.7 to 5.5 V Input and 5 V Output, -40 to 85 degC, 6-Pin SC70 (DCK), Green (RoHS & no Sb/Br)", Manufacturer="Texas Instruments", Switching Frequency(Max)(kHz)=2000, Code_JEDEC=MO-203-AB, ComponentLink1Description=Datasheet, ComponentLink1URL=http://www.ti.com/general/docs/lit/getliterature.tsp?genericPartNumber=TPS61222&fileType=pdf, ComponentLink2Description="Package Specification", ComponentLink2URL=http://www.ti.com/litv/pdf/mpds114c, DatasheetVersion=SLVS776, Eco-Plan="Green (RoHS & no Sb/Br)", Mounting Technology="Surface Mount", PackageDescription="6-Pin Plastic Small-Outline Package, 2 x 1.3 mm Body, 0.65 mm Pitch, 2.1 mm Lead Span", PackageReference=DCK0006A, PackageVersion="revG, Jan-2007", PartNumber=TPS61222DCKR, Regulated Outputs(#)=1, SubFamily="Step-Up Regulator", Topology=Boost, Vin(Max)(V)=5.5, Vin(Min)(V)=0.7, Vout(Max)(V)=5, Vout(Min)(V)=5
U11: library part CMP-12756-000002-1, "IC REG LINEAR 3.3V 1A UDFN3030-8", Ambient Temperature Range High=+85°C, Ambient Temperature Range Low=-40°C, Dropout Voltage=840mV, Manufacturer="Diodes Inc.", Max Junction Temp=+150°C, Max Power Dissipation=1700mW, Max Supply Voltage=6V, Min Supply Voltage=2.2V, Nominal Supply Current=60uA, Output Current=1A, Output Voltage=3.3V, Package="U-DFN3030-8 (Type E)", Temperature="-40°C to +150°C", Accuracy Percentage=1%, Automotive=No, Category=IC, ComponentLink2Description=Datasheet, ComponentLink2URL=https://www.diodes.com/assets/Datasheets/AP7361C.pdf, Device Class L1="Integrated Circuits (ICs)", Device Class L2="Power Management ICs", Device Class L3="Voltage Regulators - Linear", Digikey Description="IC REG LINEAR 3.3V 1A UDFN3030-8", Footprint Url=https://www.diodes.com/assets/Package-Files/U-DFN3030-8-Type-E.pdf, Height=0.63mm, Ipc Land Pattern Name=DFN300X300X60-8, Lead Free=Yes, Manufacturer Part Number=AP7361C-33FGE-7, Mouser Description="LDO Voltage Regulators 1A LDO Reg w/Enable 3.3V 6.5Vin 1700mW", Number of Outputs=1, Octopart=https://octopart.com/ap7361c-33fge-7-diodes+inc.-65869522, Output Type=Fixed, RoHS=TRUE, Standoff Height=0mm, Temperature Range High=+150°C, Temperature Range Low=-40°C
U12: library part CMP-0859-00006-4, "Dual-Bit Dual Supply Transceiver with Configurable Voltage Translation and 3-State Outputs, DCT0008A, LARGE T&R", F @ Nom Voltage(Max)(Mhz)=150, Generic Part Number=SN74LVC2T45, ICC @ Nom Voltage(Max)(mA)=0.004, Manufacturer="Texas Instruments", Operating Temperature Range(C)="-40 to 85", Rating=Military, tpd @ Nom Voltage(Max)(ns)=17.7,10.3,8.3,7.2, Voltage(Nom)(V)=1.8,2.5,3.3,5, 3-State Output=Yes, Bits(#)=2, DatasheetVersion=SCES516J, Input Type=CMOS/TTL, Logic=True, Output Drive (IOL/IOH)(Max)(mA)=32/-32, Output Type=CMOS, PackageReference=DCT0008A, Schmitt Trigger=No, Sub-Family="Dual Supply Translator", Technology Family=LVC, VCC(Max)(V)=5.5, VCC(Min)(V)=1.65

## Free pads (board coordinates)
  round 1.27 hole 1.016: 2(12.131,4.399) 3(13.79,3.871)

## Via types
v1: diameter 0.508, hole 0.305, Top Layer to Bottom Layer, 79 vias
v2: diameter 0.762, hole 0.381, Top Layer to Bottom Layer, 17 vias
v3: diameter 1.27, hole 0.711, Top Layer to Bottom Layer, 16 vias
v4: diameter 0.635, hole 0.381, Top Layer to Bottom Layer, 9 vias
v5: diameter 0.508, hole 0.254, Top Layer to Bottom Layer, 6 vias
v6: diameter 0.5, hole 0.2, Top Layer to Bottom Layer, 4 vias
v7: diameter 1.016, hole 0.635, Top Layer to Bottom Layer, 1 vias

## Nets (pads, with @x,y where several pads share a name; then routed paths per layer and width w, separated by ;. In a path a pad name is that pad's centre, name@x,y a point inside that pad or via, vN(x,y) a via of type N, cw(c..) or ccw(c..) an arc to the next point about the centre after c; other vN are vias at no path point)
3V3: C9.1 C10.1 C11.2 C15.1 C28.1 C30.1 J1.1 L1.1 R1.2 R2.1 R4.2 R11.1 R12.1 R13.2 R14.2 U7.9 U7.10 U9.10 U9.12 U10.1 U10.6 U11.1 U12.1 | length 54.3
  Top Layer w0.254: C11.2@3.771,31.727 C11.2 C11.2@3.971,31.727 ; v2(5.022,32.342) 4.924,32.245 4.488,32.245 C11.2@3.971,31.727 ; J1.1 5.501,30.526 5.172,30.526 C11.2@3.971,31.727 ; U10.1 U10.6 9.369,7.823 9.511,7.964 L1.1@9.511,9.916 ; C28.1@7.194,9.059 7.247,9.111 5.85,9.111 5.281,9.68 v7(5.281,11.636) 6.604,12.959 R11.1 6.618,14.807 7.647,14.807 R12.1 ; U9.10 10.389,14.821 R12.1 ; C9.1 11.119,12.517 10.896,12.74 10.896,12.99 10.61,13.276 10.61,13.784 10.587,13.807 U9.12 10.379,13.784 10.154,13.784 10.002,13.632 8.859,13.632 8.422,14.069 7.661,14.069 R12.1 ; v3(16.662,26.993) 16.739,26.993 17.281,27.534 U7.9 ; R4.2 17.493,17.44 17.821,17.112 17.821,15.044 v3(17.871,14.994) ; U7.10 19.228,28.534 19.619,28.144 C10.1 19.619,27.944 20.4,27.944 21.12,27.224 21.12,25.796 21.144,25.772 21.144,25.322 U12.1 21.217,23.112 20.564,22.459 C30.1 ; R13.2@24.773,31.369 R13.2@24.801,31.397 ; R13.2 R13.2@24.801,31.397 ; v2(26.2,31.476) 26.171,31.446 24.85,31.446 R13.2@24.801,31.397
  Top Layer w0.508: U10.1 C28.1@7.194,9.059 ; U7.9 U7.10
  Bottom Layer w0.254: v7(5.281,11.636) 4.448,12.469 C15.1 4.469,13.561 U11.1 ; v3(6.467,23.129) v3@6.495,23.101 ; R1.2@7.927,23.101 R1.2 7.955,23.117 R1.2@7.968,23.129 ; 18.71,2.266 18.755,2.22 20.663,2.22 20.681,2.238 R14.2
  Bottom Layer w0.381: v3@6.495,23.101 R1.2@7.927,23.101
  Bottom Layer w0.508: R2.1 18.301,1.857 18.71,2.266 19.587,3.143 19.587,4.032 v3(19.733,4.178)
+5V: C1.1 C2.1 C3.1 C4.1 C5.1 C6.1 C27.1 C29.1 U1.3 U2.3 U3.3 U4.3 U5.3 U6.3 U10.2 U10.4 U12.8 | length 98.5
  Top Layer w0.254: U4.3 1.257,2.401 1.339,2.483 1.339,2.885 ; U6.3 U6.3@1.257,28.69 ; C6.1 1.359,28.792 U6.3@1.257,28.69 ; v2@1.636,5.519 v2(1.615,5.54) 1.518,5.443 1.518,4.022 C4.1 1.339,2.885 ; v2(3.934,11.671) 3.967,11.704 3.967,12.53 3.645,12.852 2.673,12.852 2.919,13.098 2.919,13.175 2.982,13.238 U5.3 2.807,14.045 1.894,14.959 1.894,16.148 0.79,17.252 0.79,25.016 2.187,26.413 2.187,28.013 1.856,28.344 1.454,28.344 1.305,28.492 1.305,28.642 U6.3@1.257,28.69 ; U10.2 7.931,7.173 8.538,6.565 9.202,6.565 U10.4 9.244,4.977 9.251,4.971 9.251,2.908 9.228,2.885 ; C29.1 20.398,29.597 21.144,29.597 21.217,29.524 U12.8 21.217,28.364 21.476,28.105 23.128,28.105 23.713,28.69 U1.3 ; C1.1 24.937,30.344 24.937,28.712 U1.3 ; U2.3@26.65,14.135 25.892,14.892 25.892,27.931 25.133,28.69 U1.3 ; U2.3 26.878,13.058 26.655,12.835 C2.1 26.604,5.007 25.421,3.825 C3.1 25.321,2.59 25.133,2.401 U3.3 24.783,2.401 24.299,2.885 9.228,2.885 ; 1.339,2.885 9.228,2.885
  Bottom Layer w0.254: v2(1.615,5.54) 2.775,6.699 2.775,11.078 3.36,11.664 3.927,11.664 v2(3.934,11.671)
BOOT: Q2.3 R4.1 U7.27 | length 17.4
  Top Layer w0.254: U7.27 12.987,19.108 v2(14.674,17.422) ; v2@14.691,17.44 R4.1
  Top Layer w0.508: v2(14.674,17.422) v2@14.691,17.44
  Bottom Layer w0.381: v2(14.674,17.422) 20.66,17.422 23.392,20.154 Q2.3
  Bottom Layer w0.508: Q2.3@23.092,23.282 Q2.3
CTRL: pad.2 U8.13 | length 3.3
  Bottom Layer w0.203: pad.2 12.582,4.528 12.632,4.543 13.093,5.003 U8.13 U8.13@15.245,5.003
CTS: J1.2 Q2.2 R3.1 | length 29.3
  Top Layer w0.152: J1.2 7.637,30.424 7.929,30.132 v4(8.059,30.132)
  Bottom Layer w0.152: v4(8.059,30.132) 8.059,29.362 8.674,28.748 23.852,28.748 24.523,29.419 26.207,29.419 27.514,28.112 27.514,25.721 27.453,25.66 27.426,25.66 27.057,25.291 R3.1 26.363,24.533 26.363,23.373 25.392,22.403 Q2.2
DOUT: C19.1 C20.1 C21.1 C22.1 D_P5.1 U8.4 U11.8 | length 41.2
  Bottom Layer w0.254: C20.1 C20.1@13.285,16.101 ; U8.4 19.636,7.003 19.761,6.878
  Bottom Layer w0.508: U11.8 9.436,13.561 11.138,11.859 13.185,11.859 20.483,11.859 20.564,11.941 22.86,9.644 22.86,7.098 22.562,6.8 19.839,6.8 19.761,6.878 ; C20.1@13.285,16.101 15.658,16.101 16.054,16.498 18.771,16.498 19.168,16.101 D_P5.1
  Bottom Layer w0.635: 13.185,11.859 13.264,11.938 13.264,13.794 C21.1 C20.1 ; C22.1@13.218,20.373 13.249,20.342 13.249,18.413 C19.1 C20.1@13.28,16.131
FOD: R6.1 R8.1 R10.2 U8.14 | length 12.5
  Bottom Layer w0.254: R10.2 14.539,1.107 14.971,1.539 R8.1 14.783,2.353 14.027,2.353 13.937,2.263 R6.1@13.854,2.18 ; R6.1 13.829,2.205 13.681,2.353 13.533,2.502 13.533,2.574 13.399,2.708 12.367,2.708 10.846,4.229 10.846,4.44 12.009,5.603 13.718,5.603 13.812,5.509 15.004,5.509 U8.14
GND: C1.2 C2.2 C3.2 C4.2 C5.2 C6.2 C8.1 C9.2 C10.2 C11.1 C15.2 C16.2 C18.2 C19.2 C20.2 C21.2 C22.2 C27.2 C28.2 C29.2 C30.2 C31.1 D_P6.1 J1.5 pad.3 R9.1 R10.1 S1.2 U1.4 U2.4 U3.4 U4.4 U5.4 U6.4 U7.6 U7.12 U7.14 U7.26 U7.30 U7.37 U7.38 U7.39 U7.40 U7.41 U7.42 U7.43 U7.44 U7.45 U7.46 U7.47 U7.48 U8.1 U8.9 U8.20 U8.21 U9.6 U9.13 U10.3 U11.4 U11.9 U12.4 | length 9.2
  Top Layer w0.254: U7.38 U7.41 ; U7.47 U7.44 ; U7.37 U7.40 ; U7.46 U7.43 U7.44 ; U7.39 U7.40 ; U7.41 U7.40 ; U7.41 U7.44
  other v1: 6.35,3.81 7.62,3.81 22.86,3.81 24.13,3.81 3.175,5.08 5.715,5.08 23.495,5.08 24.765,5.08 1.27,6.35 24.13,6.35 25.4,6.35 4.445,7.62 5.715,7.62 23.495,7.62 24.765,7.62 26.035,7.62 1.27,8.89 8.89,8.89 10.16,8.89 13.97,8.89 15.24,8.89 16.51,8.89 19.05,8.89 20.32,8.89 24.13,8.89 25.4,8.89 14.605,10.16 18.415,10.16 19.685,10.16 23.495,10.16 24.765,10.16 26.035,10.16 10.16,11.43 22.86,11.43 24.13,11.43 25.4,11.43 17.145,12.7 20.955,12.7 17.78,13.97 19.05,13.97 24.13,13.97 20.955,15.24 3.81,16.51 26.67,16.51 1.905,17.78 4.445,17.78 12.065,17.78 23.495,17.78 6.35,19.05 7.62,19.05 20.32,19.05 1.905,20.32 4.445,20.32 5.715,20.32 6.985,20.32 8.255,20.32 3.81,21.59 6.35,21.59 7.62,21.59 26.67,21.59 1.905,22.86 4.445,22.86 5.08,24.13 6.35,24.13 1.905,25.4 4.445,25.4 5.715,25.4 6.985,25.4 8.255,25.4 6.35,26.67 12.7,26.67 15.24,26.67 22.86,26.67 4.445,27.94 1.905,30.48 3.175,30.48 1.27,31.75 7.62,31.75 21.59,31.75
  other v2: 26.599,2.896 18.296,3.694 5.491,12.784 16.899,19.642 21.247,30.549
  other v3: 4.641,4.211 12.847,9.479 23.612,12.781 7.492,13.016 11.687,14.915 4.003,19.012 1.844,19.03 26.995,19.865 16.619,24.595 11.308,27.048 4.143,29.703 26.439,30.262
  other v4: 3.894,2.245
  other v5: 9.914,12.113 9.248,12.718 11.948,17.107
  other v6: 16.66,4.978 15.885,6.253 17.435,6.253 16.66,7.528
I2C_SCL: R12.2 U7.35 U9.8 | length 12.2
  Top Layer w0.152: U7.35 12.365,21.012 v4(12.365,21.986)
  Top Layer w0.254: R12.2 7.661,15.824 8.523,16.687 9.664,16.687 v4(9.68,16.703) 9.68,15.989 9.848,15.822 10.388,15.822 U9.8
  Bottom Layer w0.152: v4(9.68,16.703) 9.68,20.731 10.935,21.986 v4(12.365,21.986)
I2C_SDA: R11.2 U7.36 U9.7 | length 10.5
  Top Layer w0.152: U9.7 10.401,16.308 10.401,17.841 10.467,17.907
  Top Layer w0.254: R11.2 6.731,15.86 6.731,16.304 8.334,17.907 10.467,17.907 11.237,17.907 U7.36
ILIM: R8.2 U8.12 | length 1
  Bottom Layer w0.203: R8.2 15.01,3.579 U8.12
LED-CLK: U1.5 U12.6 | length 12.1
  Top Layer w0.254: U12.6 22.59,29.272 22.59,31.32 23.52,32.25 27.26,32.25 27.473,32.038 27.473,28.137 27.324,27.988 26.906,27.988 U1.5
LED-DI: U1.6 U12.7 | length 14.7
  Top Layer w0.254: U12.7 21.94,29.272 21.94,31.252 23.348,32.659 27.705,32.659 27.854,32.511 27.854,27.574 27.469,27.19 U1.6
NetC7_1: C7.1 U8.6 | length 3.2
  Bottom Layer w0.152: U8.6 18.882,6.003 18.924,5.962 18.942,5.962 19.36,5.544 20.409,5.544 C7.1
NetC7_2: C7.2 C12.2 C13.2 C14.1 C17.1 C23.2 U8.2 | length 28.7
  Top Layer w0.508: v2(22.062,3.711) 22.069,3.717 22.069,8.475 v2(22.075,8.481)
  Bottom Layer w0.254: C13.2 C13.2@8.174,9.676 ; U8.2 21.545,8.003 C17.1 ; C14.1@21.915,6.159 C14.1 21.895,5.058 C7.2 22.065,4.881 22.065,3.714 v2(22.062,3.711)
  Bottom Layer w0.508: C23.2 6.978,7.643 8.174,7.643 C13.2 ; C13.2@8.174,9.676 8.794,10.296 C12.2 8.794,11.433 9.442,10.785 15.958,10.785 18.264,8.479 18.264,8.137 ; v2(22.075,8.481) 22.106,8.45 C17.1
NetC12_1: C12.1 C13.1 D_P3.1 | length 4.4
  Bottom Layer w0.635: D_P3.1 4.595,9.611 6.964,9.611 C13.1 6.974,9.676 7.1,9.801 7.1,11.353 C12.1
NetC14_2: C14.2 U8.5 | length 3
  Bottom Layer w0.102: U8.5 18.762,6.503 18.907,6.358 18.907,6.338 19.053,6.193 21.082,6.193 C14.2
NetC17_2: C17.2 U8.3 | length 2.9
  Bottom Layer w0.152: U8.3 18.956,7.503 19.042,7.59 20.959,7.59 C17.2
NetC18_1: C18.1 U11.5 | length 2.6
  Bottom Layer w0.381: C18.1 7.325,17.333 7.876,16.781 8.789,15.869 8.789,15.527 8.804,15.511 U11.5
NetC23_1: C23.1 C24.1 C25.1 C26.1 D_P4.1 U8.19 | length 13.8
  Bottom Layer w0.102: C23.1@6.932,6.332 C23.1 C23.1@7.075,6.19 ; C24.1 C24.1@9.554,5.065 ; C26.1@9.454,6.29 C26.1
  Bottom Layer w0.203: C26.1@9.454,6.29 C25.1 9.747,7.776 9.747,7.922 10.199,8.374 14.639,8.374 U8.19 ; C24.1@9.554,5.065 C26.1
  Bottom Layer w0.381: C23.1@7.075,6.19 C26.1
  Bottom Layer w0.635: D_P4.1 C23.1@6.932,6.332
NetC24_2: C24.2 U8.15 | length 5.1
  Bottom Layer w0.254: C24.2 11.492,6.003 U8.15
NetC25_2: C25.2 U8.17 | length 4.9
  Bottom Layer w0.152: C25.2 11.11,6.828 13.782,6.828 13.958,7.003
  Bottom Layer w0.203: 13.958,7.003 U8.17
NetC26_2: C26.2 U8.16 | length 4.8
  Bottom Layer w0.102: C26.2 10.354,6.19 10.668,6.503 U8.16
NetD_P1_1: D_P1.1 U9.4 | length 3.1
  Top Layer w0.254: U9.4 14.035,15.307 14.331,15.011 14.331,14.544 14.79,14.085 14.842,14.085 15.367,13.56 D_P1.1@15.367,13.462
NetD_P2_1: D_P2.1 U9.5 | length 2.1
  Top Layer w0.254: U9.5 15.054,15.807 D_P2.1@15.367,15.494
NetL1_2: L1.2 U10.5 | length 4
  Top Layer w0.254: U10.5 9.317,7.246 9.84,7.246 11.511,8.916 L1.2@11.511,9.916
NetQ1_1: Q1.1 R3.2 | length 3.7
  Bottom Layer w0.152: Q1.1 25.507,28.915 27.057,27.365 R3.2
NetQ2_1: Q2.1 R5.2 | length 1.5
  Bottom Layer w0.152: Q2.1 25.617,24.455 R5.2
NetR2_2: R2.2 U8.11 | length 2.9
  Bottom Layer w0.102: R2.2@17.234,1.857 R2.2
  Bottom Layer w0.203: U8.11 15.91,3.181 R2.2@17.234,1.857
NetR13_1: R13.1 U12.5 | length 2.5
  Top Layer w0.254: U12.5 23.167,30.158 23.861,30.852 R13.1
NetR14_1: R14.1 U7.7 U8.7 | length 31
  Top Layer w0.076: 19.363,25.534 v2(19.647,25.25)
  Top Layer w0.254: U7.7 19.363,25.534 ; v2(21.018,3.564) 21.018,10.884 22.525,12.39 v2(22.525,21.763)
  Bottom Layer w0.254: U8.7 18.317,5.496 18.976,5.496 19.431,5.042 20.091,5.042 20.597,4.536 20.597,4.123 21.018,3.701 v2(21.018,3.564) 21.116,3.466 21.116,2.816 21.504,2.428 21.504,2.365 21.631,2.238 R14.1 ; v2(19.647,25.25) 20.163,25.25 21.153,24.26 21.153,22.959 21.893,22.219 21.931,22.219 22.387,21.763 v2(22.525,21.763)
NetU1_1: U1.1 U2.6 | length 11.7
  Top Layer w0.254: U1.1 24.968,27.18 24.968,15.556 U2.6
NetU1_2: U1.2 U2.5 | length 14.2
  Top Layer w0.254: U1.2 24.783,27.94 24.181,27.338 24.181,15.004 24.389,14.795 U2.5
NetU2_1: U2.1 U3.6 | length 15.9
  Top Layer w0.203: U2.1 27.628,15.546 27.787,15.386 27.787,2.015 27.747,1.975 27.747,1.615 U3.6@27.033,0.901
  Top Layer w0.254: U3.6 U3.6@27.033,0.901
NetU2_2: U2.2 U3.5 | length 13.9
  Top Layer w0.203: U3.5@27.081,1.699 27.417,2.035 27.417,2.112 27.457,2.152 27.457,14.526 27.235,14.747
  Top Layer w0.254: U3.5 26.906,1.699 U3.5@27.081,1.699 ; U2.2 26.926,14.747 27.235,14.747
NetU3_1: U3.1 U4.6 | length 22
  Top Layer w0.254: U4.6 U3.1
NetU3_2: U3.2 U4.5 | length 22
  Top Layer w0.254: U4.5 U3.2
NetU4_1: U4.1 U5.6 | length 16.3
  Top Layer w0.203: U4.1 0.345,0.901 0.173,1.073 0.173,15.374 0.345,15.546 U5.6
NetU4_2: U4.2 U5.5 | length 13.8
  Top Layer w0.203: U4.2@1.034,1.699 0.859,1.699 0.503,2.055 0.503,14.392 0.859,14.747 U5.5@1.034,14.747
  Top Layer w0.254: U4.2@1.034,1.699 U4.2 ; U5.5@1.034,14.747 U5.5
NetU5_1: U5.1 U6.6 | length 11.8
  Top Layer w0.254: U6.6@2.875,27.19 U6.6@2.875,27.142 ; U5.1 2.923,15.546 2.875,15.594 U6.6@2.875,27.142 ; U6.6 2.923,27.19 U6.6@2.875,27.142
NetU5_2: U5.2 U6.5 | length 15.3
  Top Layer w0.254: U5.2 3.03,14.844 3.438,14.844 5.131,16.536 5.131,23.127 3.622,24.635 3.622,27.445 3.205,27.862 3.205,27.892 3.157,27.94 U6.5
RECT: C16.1 R6.2 U8.18 | length 11
  Top Layer w0.254: v2(10.244,3.52) 10.341,3.618 10.341,3.922 ; 10.342,3.923 10.342,6.26 v2(11.664,7.582)
  Bottom Layer w0.102: C16.1@12.771,7.582 C16.1 ; C16.1@13.073,7.513 C16.1@13.083,7.503
  Bottom Layer w0.203: v2(10.244,3.52) 10.351,3.414 10.689,3.414 11.897,2.205 R6.2 ; v2(11.664,7.582) C16.1@12.771,7.582 ; C16.1@13.083,7.503 U8.18
Reset_N: C8.2 Q1.3 R1.1 S1.1 U7.19 | length 40.4
  Top Layer w0.152: 10.686,19.017 10.686,20.549 10.684,20.55 10.684,21.423 10.774,21.512 11.332,21.512 11.466,21.645 v4(11.466,23.604)
  Top Layer w0.203: S1.1 3.918,10.793 4.569,11.444 4.569,14.21 5.461,15.101 5.461,17.866 6.048,18.453 10.122,18.453 10.686,19.017
  Top Layer w0.254: U7.19@10.087,25.534 10.544,25.534 11.509,24.57 11.509,23.647 v4(11.466,23.604)
  Top Layer w0.508: U7.19 U7.19@10.087,25.534
  Bottom Layer w0.254: R1.1 9.426,24.013 9.835,23.604 v4(11.466,23.604) 15.773,27.912 21.617,27.912 C8.2 21.667,27.962 23.204,27.962 Q1.3
RFID-LPD: U7.20 U9.1 | length 31
  Top Layer w0.076: U7.20 U7.20@10.087,24.534
  Top Layer w0.152: U7.20@10.087,24.534 10.858,23.763 v4(10.858,23.01) ; U9.1 13.402,11.69 13.985,11.107 18.024,11.107 21.415,14.498 v4(21.415,19.827)
  Bottom Layer w0.076: v4(10.858,23.01) v4@10.912,22.957
  Bottom Layer w0.152: v4@10.912,22.957 18.285,22.957 v4(21.415,19.827)
RFID-V_EH: C31.2 U7.34 U9.3 | length 23.7
  Top Layer w0.102: U9.3 U9.3@13.502,14.708 ; v5@15.616,21.979 15.621,21.979 v5(15.618,21.981) ; v5@19.563,18.537 v5(19.571,18.545)
  Top Layer w0.152: U9.3@13.167,14.808 13.787,14.808 14.013,14.582 14.013,12.555 14.679,11.89 17.643,11.89 19.563,13.81 v5@19.563,18.537 ; U7.34 14.047,21.594 15.231,21.594 v5@15.616,21.979 ; v5(19.571,18.545) 19.641,18.545 20.426,17.76 C31.2
  Bottom Layer w0.152: v5(15.618,21.981) 19.055,18.545 v5(19.571,18.545)
RFID_INT: U7.31 U9.11 | length 17
  Top Layer w0.152: v5(9.701,14.233) 9.739,14.27 10.365,14.27 U9.11 ; v4(16.675,22.25) 16.675,21.047 U7.31
  Bottom Layer w0.152: v5(9.701,14.233) 9.701,15.484 9.184,16.001 9.184,20.595 11.071,22.482 15.729,22.482 15.96,22.25 v4(16.675,22.25)
RTS: J1.6 Q1.2 R5.1 | length 21.1
  Top Layer w0.152: J1.6 7.019,27.884 7.478,28.344 v4(8.087,28.344) 8.123,28.344 v4@8.125,28.341
  Bottom Layer w0.152: v4(8.087,28.344) 16.161,28.344 16.286,28.469 24.228,28.469 25.044,27.653 25.044,27.178 Q1.2 25.207,26.446 24.918,26.157 24.918,25.811 24.74,25.634 R5.1
SPI-CLK: U7.29 U12.3 | length 12.2
  Top Layer w0.254: U7.29 14.987,19.384 15.383,18.988 15.383,18.929 15.532,18.78 18.643,18.78 22.517,22.655 U12.3
SPI_MOSI: U7.1 U12.2 | length 7.5
  Top Layer w0.254: U7.1 18.335,19.757 18.721,19.757 18.743,19.779 18.832,19.779 21.867,22.814 U12.2
TAG-RxD: J1.3 U7.22 | length 10.7
  Top Layer w0.152: J1.3 6.2,29.751 7.704,29.751 7.981,29.474 8.089,29.474 8.269,29.294 9.084,28.478 9.084,23.088 9.637,22.534 U7.22
TAG-TxD: J1.4 U7.23 | length 10
  Top Layer w0.152: J1.4 8.013,29.154 8.805,28.363 8.805,21.759 9.029,21.534 U7.23
TERM: R9.2 U8.10 | length 1.4
  Bottom Layer w0.102: R9.2 R9.2@17.41,2.928
  Bottom Layer w0.203: R9.2@17.41,2.928 U8.10
pads on no net: J1.0 U6.1 U6.2 U7.2 U7.3 U7.4 U7.5 U7.8 U7.11 U7.13 U7.15 U7.16 U7.17 U7.18 U7.21 U7.24 U7.25 U7.28 U7.32 U7.33 U7.EG U8.8 U9.2 U9.9 U11.2 U11.3 U11.6 U11.7

## Polygon pours and split planes (outlines as drawn)
GND on Bottom Layer "GND_L04_P001" (solid, pour order 1): 0.015,33.03 8.768,33.03 8.768,29.098 8.778,29.088 19.187,29.088 19.19,29.086 19.19,33.015 19.192,33.017 27.917,33.017 27.917,0.02 27.887,-0.01 -0.003,-0.01 -0.003,33.033 -0.008,33.038
GND on Top Layer "GND_L01_P000" (solid, pour order 0): 0,33.007 8.753,33.007 8.753,29.075 8.763,29.065 19.172,29.065 19.175,29.062 19.175,32.992 19.177,32.994 27.902,32.994 27.902,-0.003 27.872,-0.034 -0.018,-0.034 -0.018,33.009 -0.023,33.014
GND on Int1 (GND) (split plane): 9.063,32.51 9.063,29.08 18.852,29.08 18.867,29.096 18.918,32.51 27.43,32.51 27.43,0.51 0.51,0.51 0.51,32.51
3V3 on Int2 (PWR) (split plane): 9.093,32.51 9.106,29.111 19.098,29.111 19.103,29.106 19.103,32.51 27.43,32.51 27.43,0.51 0.51,0.51 0.51,32.51

## Other copper
Int1 (GND) (plane layer: these items are gaps in the copper):
  pour cut-out: 18.867,29.096 18.852,29.08 9.063,29.08 9.063,33.134 9.027,33.17 18.928,33.17
Int2 (PWR) (plane layer: these items are gaps in the copper):
  pour cut-out: 9.106,29.111 19.098,29.111 19.103,29.106 19.103,33.066 19.004,33.165 9.091,33.165

## Silkscreen, mask and mechanical layers (free items; w line width, h text height)
Top Overlay:
  text "Thermistor R7" at 10.983,5.923 h0.51 r340
Bottom Overlay:
  text "+" at 24.239,15.453 h1.52
  text "BATT" at 21.085,14.176 h1.27
  text "-" at 24.389,13.292 h1.52
  text "R7 Thermistor" at 16.388,3.935 h0.51 r340

## Text inside footprints (layer, text, board x,y; h text height)
R1: Mechanical 15 "1" at 7.955,24.074 h0.15 r90; Mechanical 15 "2" at 7.955,23.134 h0.15 r90
R2: Mechanical 15 "1" at 18.298,1.857 h0.15; Mechanical 15 "2" at 17.358,1.857 h0.15
R3: Mechanical 15 "1" at 27.057,25.166 h0.15 r270; Mechanical 15 "2" at 27.057,26.106 h0.15 r270
R5: Mechanical 15 "1" at 24.616,25.634 h0.15 r180; Mechanical 15 "2" at 25.556,25.634 h0.15 r180
R11: Mechanical 15 "2" at 6.604,15.672 h0.15 r90; Mechanical 15 "1" at 6.604,14.732 h0.15 r90
R12: Mechanical 15 "2" at 7.661,15.7 h0.15 r90; Mechanical 15 "1" at 7.661,14.76 h0.15 r90
R13: Mechanical 15 "1" at 23.8,31.417 h0.15; Mechanical 15 "2" at 24.74,31.417 h0.15
R14: Mechanical 15 "1" at 21.755,2.238 h0.15; Mechanical 15 "2" at 20.815,2.238 h0.15